# Altium PCB 显示与输入.PcbDoc (part 1 of 2)
Units mil, origin at the board's own origin, x right, y up, seen from the top; angles counter-clockwise.
Board outline 6446.74 x 5131.17 mil, 2 copper layers (Top Layer, Bottom Layer); 64 components, 63 nets, 238 pads, 176 vias.
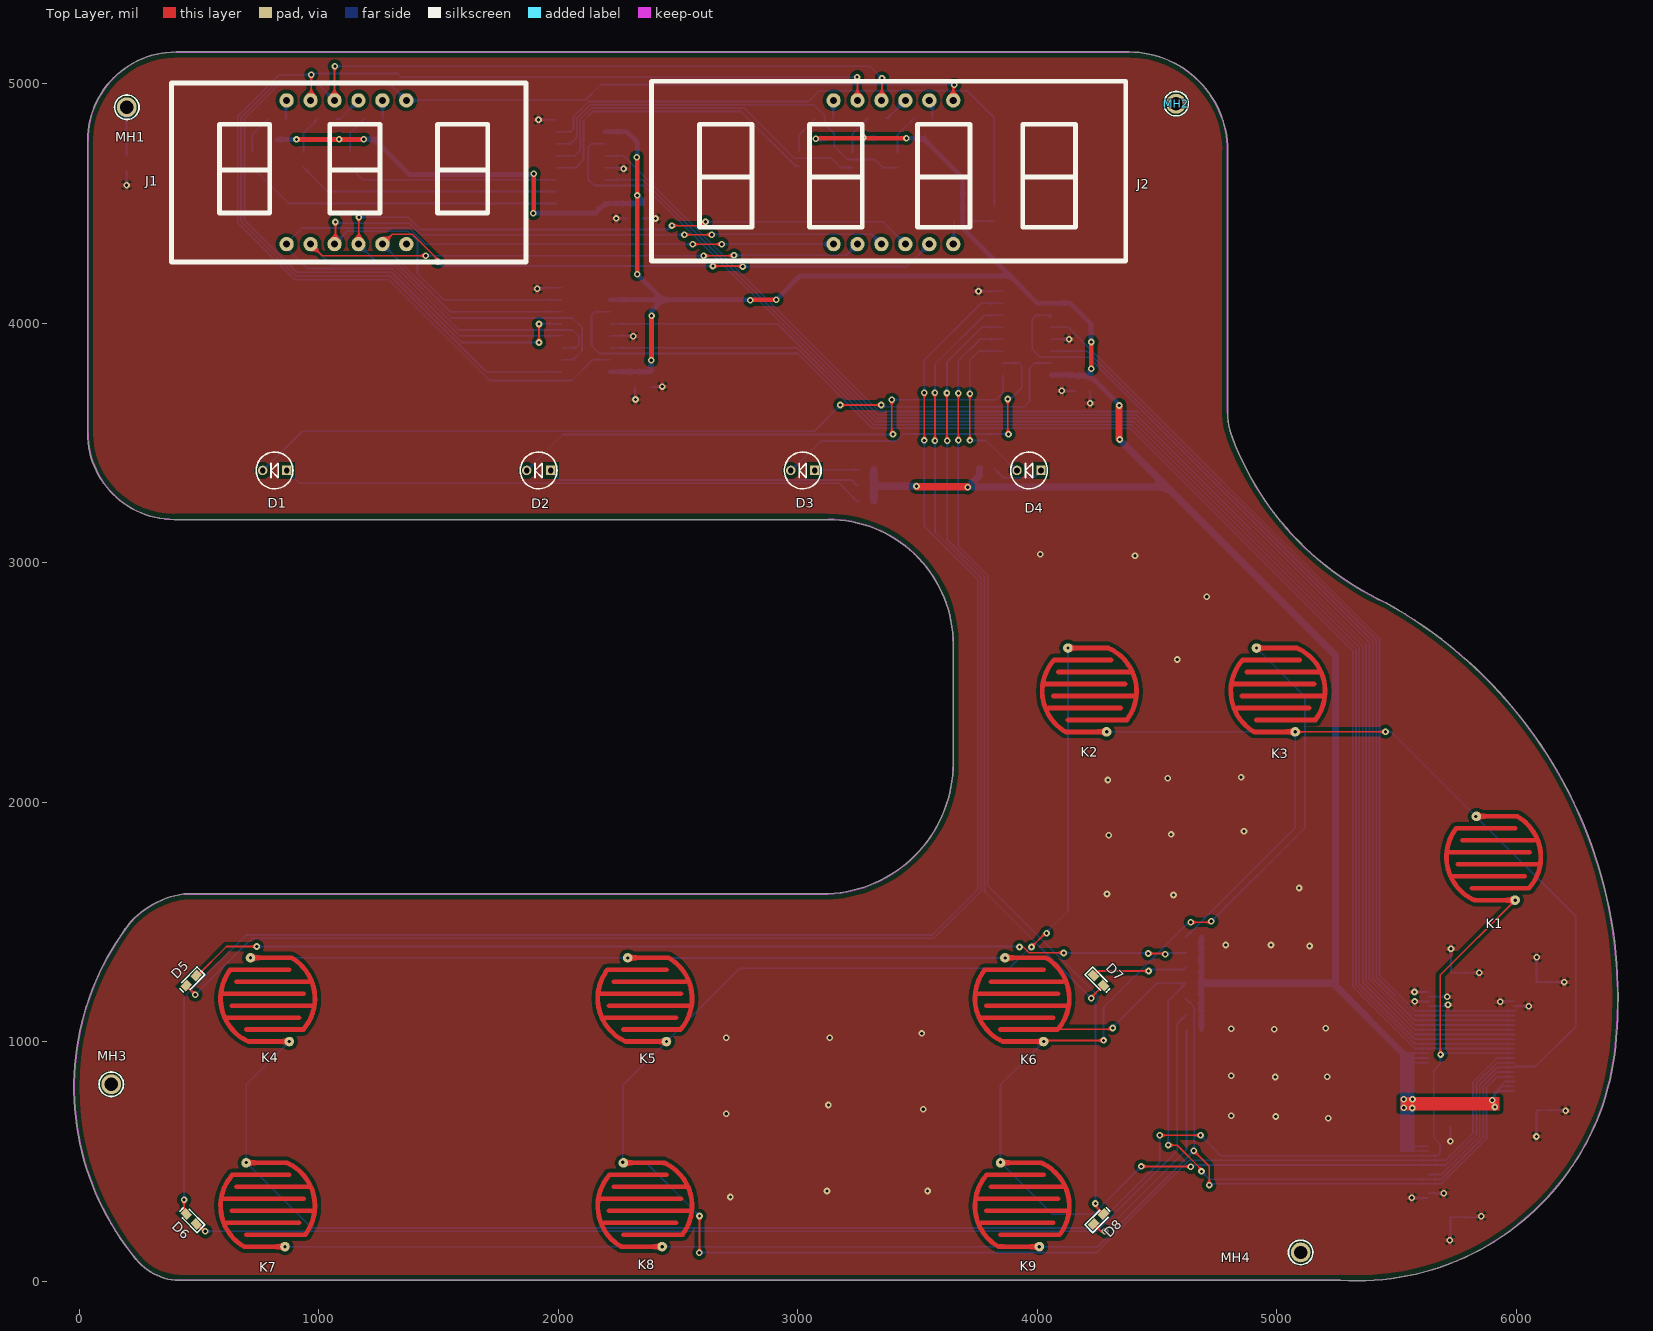
[diagram p0: Top Layer view]
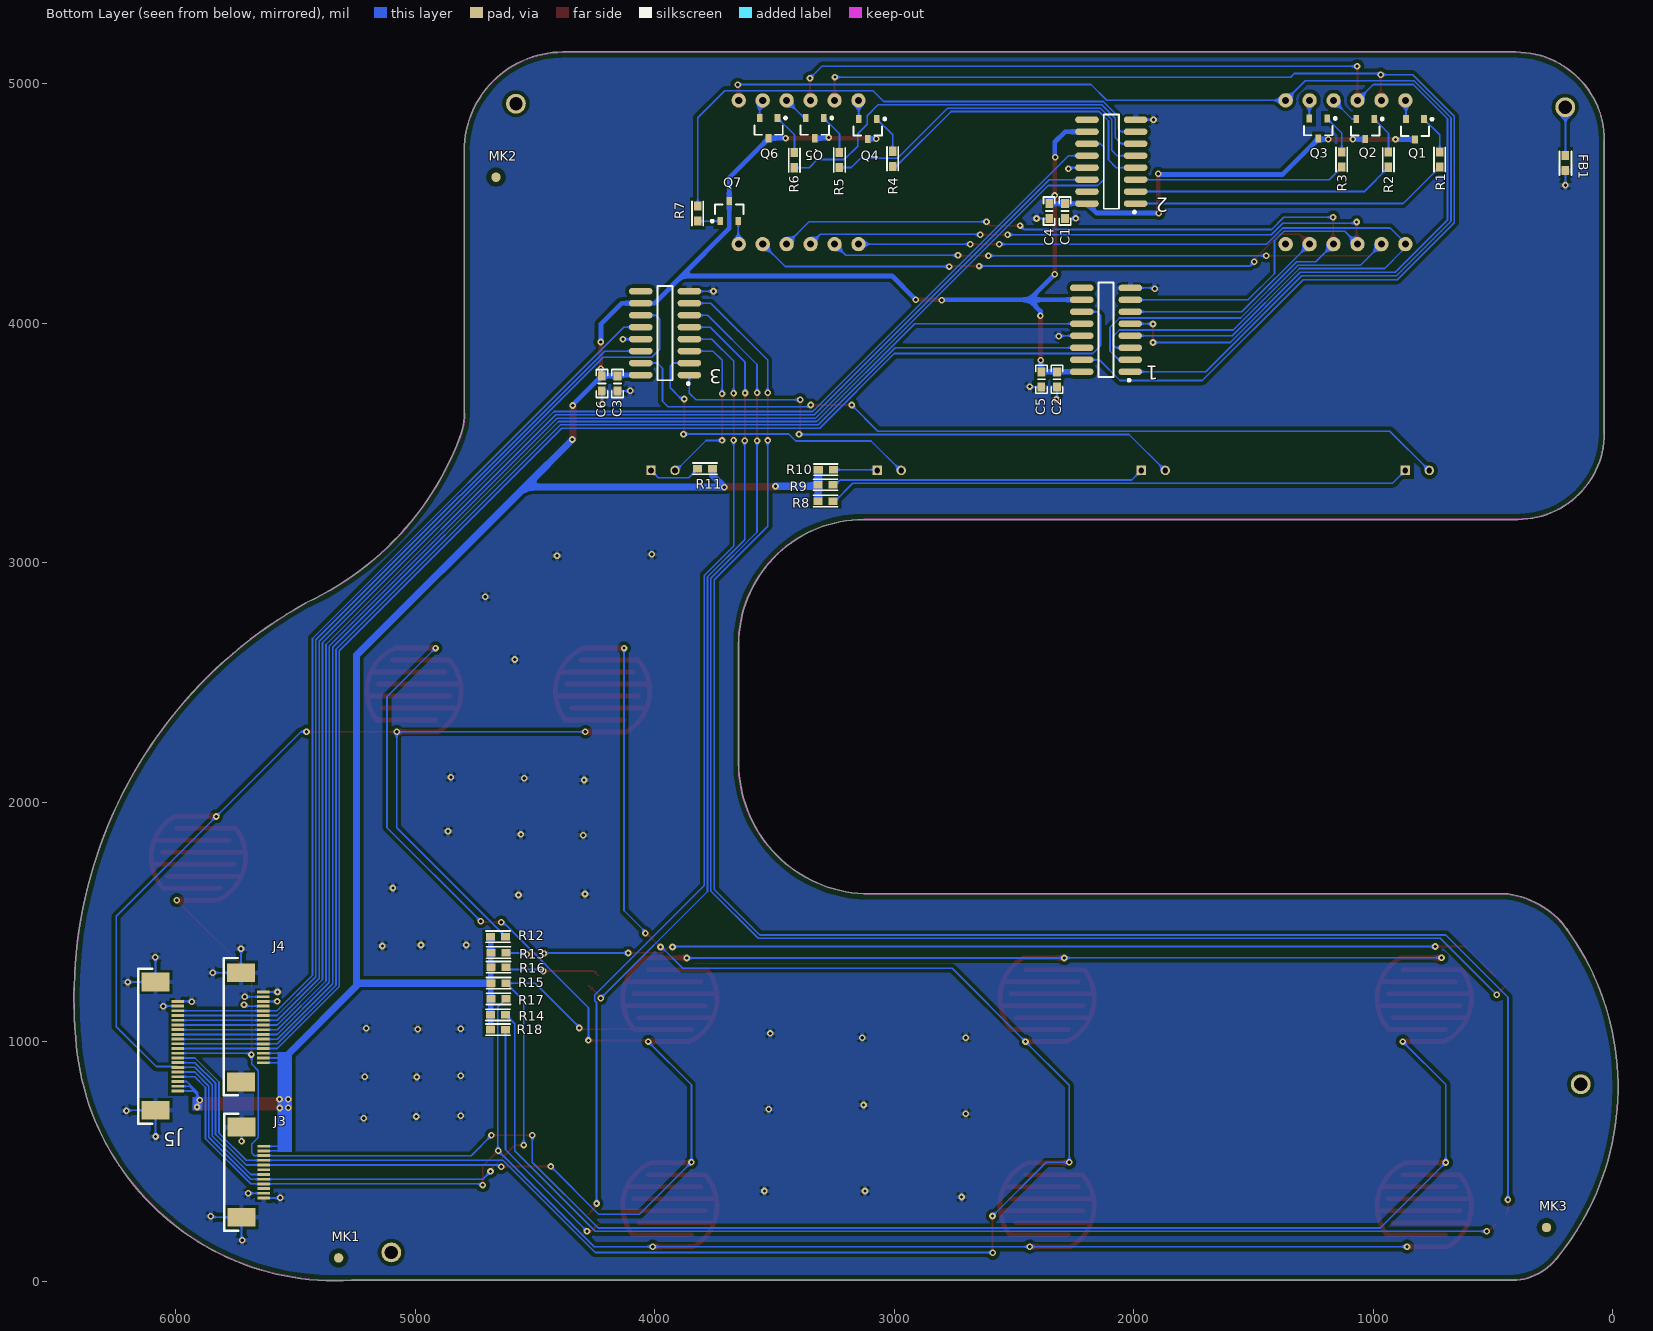
[diagram p1: Bottom Layer view, seen from below]

## Layer stack, top to bottom
Top Solder: solder mask 0.4, Solder Resist, Dk 3.5
Top Layer: signal copper 1.4
Dielectric 1: dielectric 12.6, FR-4, Dk 4.8
Bottom Layer: signal copper 1.4
Bottom Solder: solder mask 0.4, Solder Resist, Dk 3.5

## Board outline
236.76,92.43 ccw(c238.29,93.69) 237.54,91.86 ccw(c422.5,242.5) 416.95,4.02 ccw(c417,6) 417.02,4.02 5264.8,4.02 ccw(c5334,1087.59) 6417.47,1016.93 ccw(c5334,1087.59) 6417.48,1016.96 6417.47,1016.93 ccw(c4539.29,1185.8) 6425.05,1185.8 ccw(c4539.29,1185.8) 5455.66,2833.93 ccw(c5454.25,2832.54) 5455.08,2834.34 cw(c5976.33,3960.82) 4813.88,3525.63 ccw(c4811.9,3525.58) 4813.74,3526.33 cw(c5056.28,3624.72) 4794.54,3625 4795.9,4719.73 ccw(c4793.91,4719.73) 4795.9,4719.73 ccw(c4793.91,4719.73) 4795.88,4719.98 ccw(c4793.91,4720.24) 4795.9,4720.24 ccw(c4383.15,4720.24) 4383.18,5132.98 ccw(c4383.15,4720.24) 4383.15,5132.98 cw(c4383.15,5131) 4383.18,5132.98 4383.15,5132.98 404.74,5132.98 ccw(c404.74,4763.26) 35.02,4763.26 35.02,3542.05 ccw(c396.26,3542.05) 396.26,3180.81 3127.08,3180.81 cw(c3127.08,2658.87) 3649.02,2658.87 3649.02,2164.06 cw(c3102.94,2164.06) 3102.94,1617.98 438,1617.98 ccw(c438,1616) 437.72,1617.96 ccw(c490.5,1246.5) 215.65,1501.9 ccw(c216.47,1500.1) 214.91,1501.31 ccw(c1104.5,810.5)

## Design rules (kind name [scope] priority, off if disabled: settings)
AcuteAngle [All] p1: minimum=4.50000000000000E+0001 checktracksonly=TRUE // 默认角
Clearance Clearance_MK [(Component Like 'MK*')] p1: gap=20
Clearance Clearance_keep [InPolygon vs OnLayer('Keep-Out Layer')] p2: gap=20
Clearance Clearance_MH [InPolygon vs HasFootprint('AS_D3mm-6mm')] p3: gap=25
Clearance Clearance_poly [InPolygon] p4: gap=15 // 更改敷铜间距设置，默认20mil
Clearance Clearance_via_all [isvia] p5: gap=7 // 过孔安全间距设置，默认7mil
Clearance Clearance_pad_all [ispad] p6: gap=7 // 焊盘安全间距设置，默认7mil
Clearance Clearance_All [All] p7: gap=7 // 全局安全间距设置，默认7mil
ComponentClearance [All] p1: gap=4 collisioncheckmode=3 verticalgap=4 showdistances=FALSE
DiffPairsRouting DiffPairsRouting_all [(InDifferentialPairClass('All Differential Pairs'))] p1: maxlimit=7 minlimit=7 mostfreqgap=7 toplayer_minwidth=15 toplayer_maxwidth=15 toplayer_prefwidth=15 bottomlayer_minwidth=15 bottomlayer_maxwidth=15 bottomlayer_prefwidth=15 maxuncoupledlength=500 // 更改差分在每层
HoleSize [All] p1: absolutevalues=TRUE maxlimit=393.7 minlimit=1 maxpercent=80.000 minpercent=20.000
HoleToHoleClearance [All] p1: gap=4 allowstackedmicrovias=TRUE
Length [All] p1: maxlimit=99999 minlimit=0
MatchedLengths DiffPair_MatchedLengths [InDifferentialPair ('RXIN1') Or InDifferentialPair ('RXIN2') Or InDifferentialPair ('RXIN0') Or InDifferentialPair ('RXCLK')] p1: tolerance=100 checknetsindiffpair=TRUE checkdiffpairvsdiffpair=TRUE checkothers=TRUE
MinimumSolderMaskSliver [All] p1: minsoldermaskwidth=4
PlaneClearance PlaneClearance_via [isvia] p1: clearance=20 // 过孔在Plane层的隔离大小设置，在过孔密
PlaneClearance PlaneClearance_all [All] p2: clearance=20
PlaneConnect PlaneConnect_via [isvia] p1: planeconnectstyle=Direct reliefexpansion=20 reliefentries=4 reliefconductorwidth=10 reliefairgap=10 // 电源地在plane层过孔全连接
PlaneConnect PlaneConnect_all [All] p2: planeconnectstyle=Relief reliefexpansion=20 reliefentries=4 reliefconductorwidth=10 reliefairgap=10
PolygonConnect PolygonConnect_DGND [InNet('DGND')] p1: connectstyle=Relief reliefconductorwidth=20 reliefentries=4 polygonreliefangle="90 Angle" airgapwidth=10
PolygonConnect PolygonConnect_via [isvia] p2: connectstyle=Direct reliefconductorwidth=10 reliefentries=4 polygonreliefangle="90 Angle" airgapwidth=10 // 敷铜过孔全连接
PolygonConnect PolygonConnect_AGND [InNet('AGND')] p3: connectstyle=Relief reliefconductorwidth=20 reliefentries=4 polygonreliefangle="90 Angle" airgapwidth=10 // 敷铜过孔全连接
PolygonConnect PolygonConnect_all [All] p4: connectstyle=Direct reliefconductorwidth=10 reliefentries=4 polygonreliefangle="90 Angle" airgapwidth=10
RoutingCorners [All] p1: cornerstyle=45-Degree minsetback=50 maxsetback=50
RoutingVias RoutingVias_all [All] p1: holewidth=13.78 width=27.56 viastyle="Through Hole" minholewidth=13.78 minwidth=27.56 maxholewidth=35.43 maxwidth=50 // 更改过孔设置，默认最小12/24mil 最大20/40mil
SMDNeckDown [All] p1: percent=200.000
ShortCircuit [(Component Like 'MH*') vs InNet('No Net') and isvia] p1: allowed=TRUE
SilkToSilkClearance [All] p1: silktosilkclearance=4
SilkToSolderMaskClearance SilkscreenOverComponentPads [IsPad] p1: minsilkscreentomaskgap=4 clearancetoexposedcopper=TRUE
SolderMaskExpansion [All] p1: expansion=4
Width Width_all [All] p1: maxlimit=100 minlimit=7 preferedwidth=7
19 further rules are at their usual default settings.

## Components (designator, comment, footprint, x,y, rotation, side; value= is the part's Value field where it differs from the comment)
1 "74HC595" SOIC-16 2116,3973 r0 bottom
2 "74HC595" SOIC-16 2094,4675 r0 bottom
3 "74HC595" SOIC-16 3957,3959 r0 bottom
C1 "100nf" Cap0603 2287.32,4469 r90 bottom
C2 "100nf" Cap0603 2320.68,3766 r90 bottom
C3 "100nf" Cap0603 4155.69,3749 r90 bottom
C4 "10uf/16V" Cap0603 2353.32,4469 r90 bottom
C5 "10uf/16V" Cap0603 2385.68,3766 r90 bottom
C6 "10uf/16V" Cap0603 4220.69,3749 r90 bottom
D1 "LED" LED_DIP_3mm 866.14,3385.83 r180 top
D2 "LED" LED_DIP_3mm 1968.5,3385.83 r180 top
D3 "LED" LED_DIP_3mm 3070.87,3385.83 r180 top
D4 "LED" LED_DIP_3mm 4015.75,3385.83 r180 top
D5 "LED" LED0603 472.44,1259.84 r225 top
D6 "LED" LED0603 472.44,255.91 r135 top
D7 "LED" LED0603 4251.97,1259.84 r315 top
D8 "LED" LED0603 4251.97,255.91 r45 top
FB1 "0R" FB0603 198,4669 r90 bottom
J1 "DPY-3CA" 3位数码管0.56寸 866.14,4330.71 r0 top locked
J2 "DPY-4CA" 4位数码管0.56寸 3149.61,4330.71 r0 top locked
J3 "FPC12-0.5" FPC0.5-12P 5679,456 r90 bottom
J4 "FPC16_0.5" FPC0.5-16P 5717,1056 r90 bottom
J5 "FPC20-0.5" FPC0.5-20P 6073,980 r270 bottom
K1 "SW-PB" PCB-KEY#1 5905.51,1771.65 r270 top
K2 "SW-PB" PCB-KEY#2 4217.86,2464.2 r90 top
K3 "SW-PB" PCB-KEY#3 5005.26,2464.2 r90 top
K4 "SW-PB" PCB-KEY#4 787.4,1181.1 r270 top
K5 "SW-PB" PCB-KEY#5 2362.2,1181.1 r270 top
K6 "SW-PB" PCB-KEY#6 3937.01,1181.1 r270 top
K7 "SW-PB" PCB-KEY#7 787.4,314.96 r90 top
K8 "SW-PB" PCB-KEY#8 2362.2,314.96 r90 top
K9 "SW-PB" PCB-KEY#9 3937.01,314.96 r90 top
MH1 "MH" AS_D1mm_2mm#1 199,4902 r0 top
MH2 "MH" AS_D1mm_2mm#2 4580,4917 r0 top
MH3 "MH" AS_D1mm_2mm#2 134,823 r0 top
MH4 "MH" AS_D1mm_2mm#2 5100,121 r0 top
MK1 "Mark" MK 5320,98 r180 bottom
MK2 "Mark" MK 4663,4610 r90 bottom
MK3 "Mark" MK 277,225 r90 bottom
Q1 "S8550" SOT-23B 826,4810 r270 bottom
Q2 "S8550" SOT-23B 1034,4811 r270 bottom
Q3 "S8550" SOT-23B 1230,4813 r270 bottom
Q4 "S8550" SOT-23B 3111,4811 r270 bottom
Q5 "S8550" SOT-23B 3332,4815 r270 bottom
Q6 "S8550" SOT-23B 3525,4815 r270 bottom
Q7 "S8550" SOT-23B 3689,4469 r90 bottom
R1 "1K,5%" Res0603 723,4684 r90 bottom
R2 "1K,5%" Res0603 937,4683 r90 bottom
R3 "1K,5%" Res0603 1132,4684 r90 bottom
R4 "1K,5%" Res0603 3007,4687 r90 bottom
R5 "1K,5%" Res0603 3229,4682 r90 bottom
R6 "1K,5%" Res0603 3417,4681 r90 bottom
R7 "1K,5%" Res0603 3821,4458 r270 bottom
R8 "1K,5%" Res0603 3287,3258 r180 bottom
R9 "1K,5%" Res0603 3287,3326 r180 bottom
R10 "1K,5%" Res0603 3286,3389 r180 bottom
R11 "1K,5%" Res0603 3790,3393 r0 bottom
R12 "10K,5%" Res0603 4654,1439 r180 bottom
R13 "1K,5%" Res0603 4653,1373 r180 bottom
R14 "1K,5%" Res0603 4654,1113 r180 bottom
R15 "10K,5%" Res0603 4652,1245 r180 bottom
R16 "1K,5%" Res0603 4652,1312 r180 bottom
R17 "10K,5%" Res0603 4652,1180 r180 bottom
R18 "1K,5%" Res0603 4655,1051 r180 bottom

## Footprints (in the part's own frame and the unit in brackets; to place one, negate y for a bottom-side part, rotate by r counter-clockwise, add the part's x,y. Pads: shape width x height; smd on the part's side, far side on the other; paste and mask are expansions set on the pad)
3位数码管0.56寸 [mil]
  round 60 hole 30: 1(0,0) 2(100,0) 3(200,0) 4(300,0) 5(400,0) 6(500,0) 7(500,600) 8(400,600) 9(300,600) 10(200,600) 11(100,600) 12(0,600)
  silkscreen extent -480,-75 1000,673
4位数码管0.56寸 [mil]
  round 60 hole 30: 1(0,0) 2(100,0) 3(200,0) 4(300,0) 5(400,0) 6(500,0) 7(500,600) 8(400,600) 9(300,600) 10(200,600) 11(100,600) 12(0,600)
  silkscreen extent -760,-70 1220,680
AS_D1mm_2mm#1 [mm] "内径1mm，外径2"
  round 2.1 hole 1.4: MH1(0,0)
  silkscreen extent -1.3,-1.3 1.3,1.3
AS_D1mm_2mm#2 [mm] "内径1mm，外径2"
  round 2.1 hole 1.4 unplated: MH1(0,0)
  silkscreen extent -1.3,-1.3 1.3,1.3
Cap0603 [mm] "0603电容"
  rect 0.965x0.8 smd: 1(-0.8,0) 2(0.8,0)
  silkscreen extent -1.48,-0.6 1.48,0.6
FB0603 [mm] "0603磁珠"
  rect 0.965x0.8 smd: 1(-0.8,0) 2(0.8,0)
  silkscreen extent -1.27,-0.64 1.27,0.64
FPC0.5-12P [mm] "FPC0.5-12P;0.5mm;"
  rect 0.3x1.3 smd mask+0.051: 1(-2.744,-1.175) 2(-2.244,-1.175) 3(-1.744,-1.175) 4(-1.244,-1.175) 5(-0.744,-1.175) 6(-0.244,-1.175) 7(0.256,-1.175) 8(0.756,-1.175) 9(1.256,-1.175) 10(1.756,-1.175) 11(2.256,-1.175) 12(2.756,-1.175)
  rect 2x3 smd mask+0.051: 13(-4.787,1.175) 14(4.787,1.175)
  silkscreen extent -6.2,1.5 6.2,3
FPC0.5-16P [mm] "FPC0.5-16P;0.5mm"
  rect 0.3x1.3 smd mask+0.051: 1(-3.633,-2.081) 2(-3.133,-2.081) 3(-2.633,-2.081) 4(-2.133,-2.081) 5(-1.633,-2.081) 6(-1.133,-2.081) 7(-0.633,-2.081) 8(-0.133,-2.081) 9(0.367,-2.081) 10(0.867,-2.081) 11(1.367,-2.081) 12(1.867,-2.081) 13(2.367,-2.081) 14(2.867,-2.081) 15(3.367,-2.081) 16(3.867,-2.081)
  rect 2x3 smd mask+0.051: 17(-5.676,0.268) 18(5.91,0.269)
  silkscreen extent -7.09,0.59 7.47,2.09
FPC0.5-20P [mm] "FPC0.5-20P;0.5mm;"
  rect 0.3x1.3 smd mask+0.051: 1(-4.806,2.064) 2(-4.306,2.064) 3(-3.806,2.064) 4(-3.306,2.064) 5(-2.806,2.064) 6(-2.306,2.064) 7(-1.806,2.064) 8(-1.306,2.064) 9(-0.806,2.064) 10(-0.306,2.064) 11(0.194,2.064) 12(0.694,2.064) 13(1.194,2.064) 14(1.694,2.064) 15(2.194,2.064) 16(2.694,2.064) 17(3.194,2.064) 18(3.694,2.064) 19(4.194,2.064) 20(4.694,2.064)
  rect 2x3 smd mask+0.051: 21(-6.849,-0.286) 22(6.737,-0.286)
  silkscreen extent -8.26,-2.11 8.18,-0.61
LED0603 [mm]
  rect 1x0.8 smd: A(-0.6,0) K(0.9,0)
  silkscreen extent -1.3,-0.58 1.6,0.58
LED_DIP_3mm [mm] "3mm 直插LED"
  rect 1x1 hole 0.6: A(0,0)
  round 1 hole 0.6: K(2.54,0)
  silkscreen extent -0.68,-1.95 3.22,1.95
MK [mm] "贴片Mark点"
  round 1 smd mask+0.5: MK(0,0)
PCB-KEY#1 [mil]
  round 40 smd: 1(-169.96,-72) 2(179.96,90)
  Top Layer lines w20: -20,-190 -20,150 ; -120,-157.48 -120,90 ; 30,-150 30,136.14 30,190 ; -70,-130 -70,134.83 -70,170 ; 130,-90 130,148.76 ; -169.96,-72 -169.96,-70.77 -169.9,70.1 -169.88,97.95 ; -169.67,99.81 cw(c0,0) -51.48,190 cw(c0,0) 128.92,148.76 ; 80,-179.86 cw(c0,0) -118.11,-157.48 ccw(c0,0) -108.1,-164.51 ccw(c0,0) 51.48,-190 ccw(c0,0) 80,-179.86 ; 80,-179.86 ccw(c0,0) 179.88,-79.95 ; 80,-179.86 ccw(c0,0) 179.88,-79.95 ; 80,-179.86 80,130 80,-179.86 ; 80,-179.86 80,-179.86 ; 80,-179.86 80,-179.86 ; 80,-179.86 80,-179.86 ; 80,-179.86 80,-179.86 ; 80,-179.86 80,-179.86 ; 80,-179.86 80,-179.86 ; 80,-179.86 80,-179.86 ; 80,-179.86 80,-179.86 ; 80,-179.86 80,-179.86 ; 80,-179.86 80,-179.86 ; 80,-179.86 80,-179.86 ; 80,-179.86 80,-179.86 ; 80,-179.86 80,-179.86 ; 80,-179.86 80,-179.86 ; 80,-179.86 80,-179.86 ; 80,-179.86 80,-179.86 ; 80,-179.86 80,-179.86 ; 80,-179.86 80,-179.86 ; 80,-179.86 80,-179.86 ; 80,-179.86 80,-179.86 ; 80,-179.86 80,-179.86 ; 80,-179.86 80,-179.86 ; 80,-179.86 80,-179.86 ; 80,-179.86 80,-179.86 ; 80,-179.86 80,-179.86 ; 80,-179.86 80,-179.86 ; 80,-179.86 80,-179.86 ; 80,-179.86 80,-179.86 ; 80,-179.86 80,-179.86 ; 80,-179.86 80,-179.86 ; 80,-179.86 80,-179.86 ; 80,-179.86 80,-179.86 ; 80,-179.86 80,-179.86 ; 80,-179.86 80,-179.86 ; 80,-179.86 80,-179.86 ; 80,-179.86 80,-179.86 ; 80,-179.86 80,-179.86 ; 80,-179.86 80,-179.86 ; 80,-179.86 80,-179.86 ; 80,-179.86 80,-179.86 ; 80,-179.86 80,-179.86 ; 80,-179.86 80,-179.86 ; 80,-179.86 80,-179.86 ; 80,-179.86 80,-179.86 ; 80,-179.86 80,-179.86 ; 80,-179.86 80,-179.86 ; 80,-179.86 80,-179.86 ; 80,-179.86 80,-179.86 ; 80,-179.86 80,-179.86 ; 80,-179.86 80,-179.86 ; 80,-179.86 80,-179.86 ; 80,-179.86 80,-179.86 ; 80,-179.86 80,-179.86 ; 80,-179.86 80,-179.86 ; 80,-179.86 80,-179.86 ; 80,-179.86 80,-179.86 ; 80,-179.86 80,-179.86 ; 80,-179.86 80,-179.86 ; 80,-179.86 80,-179.86 ; 80,-179.86 80,-179.86 ; 80,-179.86 80,-179.86 ; 80,-179.86 80,-179.86 ; 80,-179.86 80,-179.86 ; 80,-179.86 80,-179.86 ; 80,-179.86 80,-179.86 ; 80,-179.86 80,-179.86 ; 80,-179.86 80,-179.86 ; 80,-179.86 80,-179.86 ; 80,-179.86 80,-179.86 ; 80,-179.86 80,-179.86 ; 80,-179.86 80,-179.86 ; 80,-179.86 80,-179.86 ; 80,-179.86 80,-179.86 ; 80,-179.86 80,-179.86 ; 80,-179.86 80,-179.86 ; 80,-179.86 80,-179.86 ; 80,-179.86 80,-179.86 ; 80,-179.86 80,-179.86 ; 80,-179.86 80,-179.86 ; 80,-179.86 80,-179.86 ; 80,-179.86 80,-179.86 ; 80,-179.86 80,-179.86 ; 80,-179.86 80,-179.86 ; 80,-179.86 80,-179.86 ; 80,-179.86 80,-179.86 ; 80,-179.86 80,-179.86 ; 80,-179.86 80,-179.86 ; 80,-179.86 80,-180 80,-179.86 ; 80,-179.86 80,-179.86 ; 80,-179.86 80,-179.86 ; 80,-179.86 80,-179.86 ; 80,-179.86 80,-179.86 ; 80,-179.86 80,-179.86 ; 80,-179.86 80,-179.86 ; 80,-179.86 80,-179.86 ; 80,-179.86 80,-179.86 ; 80,-179.86 80,-179.86 ; 80,-179.86 80,-179.86 ; 80,-179.86 80,-179.86 ; 80,-179.86 80,-179.86 ; 80,-179.86 80,-179.86 ; 80,-179.86 80,-179.86 ; 80,-179.86 80,-179.86 ; 179.88,-79.95 179.88,-79.95 ; 179.88,-79.95 179.88,-79.95 ; 179.88,-79.95 179.88,-79.95 ; 179.88,-79.95 179.88,-79.95 ; 179.88,-79.95 179.88,-79.95 ; 179.88,-79.95 179.88,-79.95 ; 179.88,-79.95 179.88,-79.95 ; 179.88,-79.95 179.88,-79.95 ; 179.88,-79.95 179.88,-79.95 ; 179.88,-79.95 179.88,-79.95 ; 179.88,-79.95 179.88,-79.95 ; 179.88,-79.95 179.88,-79.95 ; 179.88,-79.95 179.88,-79.95 ; 179.88,-79.95 179.88,-79.95 ; 179.88,-79.95 179.88,-79.95 ; 179.88,-79.95 179.88,-79.95 ; 179.88,-79.95 179.88,-79.95 ; 179.88,-79.95 179.88,-79.95 ; 179.88,-79.95 179.88,-79.95 ; 179.88,-79.95 179.88,-79.95 ; 179.88,-79.95 179.88,-79.95 ; 179.88,-79.95 179.88,-79.95 ; 179.88,-79.95 179.88,-79.95 ; 179.88,-79.95 179.88,-79.95 ; 179.88,-79.95 179.88,-79.95 ; 179.88,-79.95 179.88,-79.95 ; 179.88,-79.95 179.88,-79.95 ; 179.88,-79.95 179.88,-79.95 ; 179.88,-79.95 179.88,-79.95 ; 179.88,-79.95 179.88,-79.95 ; 179.88,-79.95 179.88,-79.95 ; 179.88,-79.95 179.88,-79.95 ; 179.88,-79.95 179.88,-79.95 ; 179.88,-79.95 179.88,-79.95 ; 179.88,-79.95 179.88,-79.95 ; 179.88,-79.95 179.88,-79.95 ; 179.88,-79.95 179.88,-79.95 ; 179.88,-79.95 179.88,-79.95 ; 179.88,-79.95 179.88,-79.95 ; 179.88,-79.95 179.88,-79.95 ; 179.88,-79.95 179.88,-79.95 ; 179.88,-79.95 179.88,-79.95 ; 179.88,-79.95 179.88,-79.95 ; 179.88,-79.95 179.88,-79.95 ; 179.88,-79.95 179.88,-79.95 ; 179.88,-79.95 179.88,-79.95 ; 179.88,-79.95 179.88,-79.95 ; 179.88,-79.95 179.88,-79.95 ; 179.88,-79.95 179.88,-79.95 ; 179.88,-79.95 179.88,-79.95 ; 179.88,-79.95 179.88,-79.95 ; 179.88,-79.95 179.88,-79.95 ; 179.88,-79.95 179.88,-79.95 ; 179.88,-79.95 179.88,-79.95 ; 179.88,-79.95 179.88,-79.95 ; 179.88,-79.95 179.88,-79.95 ; 179.88,-79.95 179.88,-79.95 ; 179.88,-79.95 179.88,-79.95 ; 179.88,-79.95 179.88,-79.95 ; 179.88,-79.95 179.88,-79.95 ; 179.88,-79.95 179.88,-79.95 ; 179.88,-79.95 179.88,-79.95 ; 179.88,-79.95 179.88,-79.95 ; 179.88,-79.95 179.88,-79.95 ; 179.88,-79.95 179.88,-79.95 ; 179.88,-79.95 179.88,-79.95 ; 179.88,-79.95 179.88,-79.95 ; 179.88,-79.95 179.88,-79.95 ; 179.88,-79.95 179.88,-79.95 ; 179.88,-79.95 179.88,-79.95 ; 179.88,-79.95 179.88,-79.95 ; 179.88,-79.95 179.88,-79.95 ; 179.88,-79.95 179.88,-79.95 ; 179.88,-79.95 179.88,-79.95 ; 179.88,-79.95 179.88,-79.95 ; 179.88,-79.95 179.88,-79.95 ; 179.88,-79.95 179.96,90 179.88,-79.95 ; 179.88,-79.95 179.88,-79.95 ; 179.88,-79.95 179.88,-79.95 ; 179.88,-79.95 179.88,-79.95 ; 179.88,-79.95 179.88,-79.95 ; 179.88,-79.95 179.88,-79.95 ; 179.88,-79.95 179.88,-79.95 ; 179.88,-79.95 179.88,-79.95 ; 179.88,-79.95 179.88,-79.95 ; 179.88,-79.95 179.88,-79.95 ; 179.88,-79.95 179.88,-79.95 ; 179.88,-79.95 179.88,-79.95 ; 179.88,-79.95 179.88,-79.95 ; 179.88,-79.95 179.88,-79.95 ; 179.88,-79.95 179.88,-79.95 ; 179.88,-79.95 179.88,-79.95 ; 179.88,-79.95 179.88,-79.95 ; 179.88,-79.95 179.88,-79.95 ; 179.88,-79.95 179.88,-79.95 ; 179.88,-79.95 179.88,-79.95 ; 179.88,-79.95 179.88,-79.95 ; 179.88,-79.95 179.88,-79.95 ; 179.88,-79.95 179.88,-79.95 ; 179.88,-79.95 179.88,-79.95 ; 179.88,-79.95 179.88,-79.95 ; 179.88,-79.95 179.88,-79.95 ; 179.88,-79.95 179.88,-79.95 ; 179.88,-79.95 179.88,-79.95 ; 179.88,-79.95 179.88,-79.95
PCB-KEY#2 [mil]
  round 40 smd: 1(-169.96,-72) 2(179.96,90)
  Top Layer lines w20: 30,190 30,-150 ; -70,170 -70,-110.8 -70,-130 ; -20,150 -20,-136.94 -20,-190 ; 128.92,148.76 ccw(c0,0) -169.67,99.81 ; 130,148.76 130,-90 ; -169.88,97.95 -169.96,-72 ; -120,90 -120,-80.94 -120,-157.48 ; 179.96,90 179.96,89.56 ; 179.96,89.56 179.88,-79.95 ; 179.96,89.56 179.88,-79.95 ; 179.88,-79.95 cw(c0,0) 80,-179.86 ; 179.88,-79.95 cw(c0,0) 80,-179.86 ; 179.88,-79.95 179.88,-79.95 ; 179.88,-79.95 179.88,-79.95 ; 179.88,-79.95 179.88,-79.95 ; 179.88,-79.95 179.88,-79.95 ; 179.88,-79.95 179.88,-79.95 ; 179.88,-79.95 179.88,-79.95 ; 179.88,-79.95 179.88,-79.95 ; 179.88,-79.95 179.88,-79.95 ; 179.88,-79.95 179.88,-79.95 ; 179.88,-79.95 179.88,-79.95 ; 179.88,-79.95 179.88,-79.95 ; 179.88,-79.95 179.88,-79.95 ; 179.88,-79.95 179.88,-79.95 ; 179.88,-79.95 179.88,-79.95 ; 179.88,-79.95 179.88,-79.95 ; 179.88,-79.95 179.88,-79.95 ; 179.88,-79.95 179.88,-79.95 ; 179.88,-79.95 179.88,-79.95 ; 179.88,-79.95 179.88,-79.95 ; 179.88,-79.95 179.88,-79.95 ; 179.88,-79.95 179.88,-79.95 ; 179.88,-79.95 179.88,-79.95 ; 179.88,-79.95 179.88,-79.95 ; 179.88,-79.95 179.88,-79.95 ; 179.88,-79.95 179.88,-79.95 ; 179.88,-79.95 179.88,-79.95 ; 179.88,-79.95 179.88,-79.95 ; 179.88,-79.95 179.88,-79.95 ; 179.88,-79.95 179.88,-79.95 ; 179.88,-79.95 179.88,-79.95 ; 179.88,-79.95 179.88,-79.95 ; 179.88,-79.95 179.88,-79.95 ; 179.88,-79.95 179.88,-79.95 ; 179.88,-79.95 179.88,-79.95 ; 179.88,-79.95 179.88,-79.95 ; 179.88,-79.95 179.88,-79.95 ; 179.88,-79.95 179.88,-79.95 ; 179.88,-79.95 179.88,-79.95 ; 179.88,-79.95 179.88,-79.95 ; 179.88,-79.95 179.88,-79.95 ; 179.88,-79.95 179.88,-79.95 ; 179.88,-79.95 179.88,-79.95 ; 179.88,-79.95 179.88,-79.95 ; 179.88,-79.95 179.88,-79.95 ; 179.88,-79.95 179.88,-79.95 ; 179.88,-79.95 179.88,-79.95 ; 179.88,-79.95 179.88,-79.95 ; 179.88,-79.95 179.88,-79.95 ; 179.88,-79.95 179.88,-79.95 ; 179.88,-79.95 179.88,-79.95 ; 179.88,-79.95 179.88,-79.95 ; 179.88,-79.95 179.88,-79.95 ; 179.88,-79.95 179.88,-79.95 ; 179.88,-79.95 179.88,-79.95 ; 179.88,-79.95 179.88,-79.95 ; 179.88,-79.95 179.88,-79.95 ; 179.88,-79.95 179.88,-79.95 ; 179.88,-79.95 179.88,-79.95 ; 179.88,-79.95 179.88,-79.95 ; 179.88,-79.95 179.88,-79.95 ; 179.88,-79.95 179.88,-79.95 ; 179.88,-79.95 179.88,-79.95 ; 179.88,-79.95 179.88,-79.95 ; 179.88,-79.95 179.88,-79.95 ; 179.88,-79.95 179.88,-79.95 ; 179.88,-79.95 179.88,-79.95 ; 179.88,-79.95 179.88,-79.95 ; 179.88,-79.95 179.88,-79.95 ; 179.88,-79.95 179.88,-79.95 ; 179.88,-79.95 179.88,-79.95 ; 179.88,-79.95 179.88,-79.95 ; 179.88,-79.95 179.88,-79.95 ; 179.88,-79.95 179.88,-79.95 ; 179.88,-79.95 179.88,-79.95 ; 179.88,-79.95 179.88,-79.95 ; 179.88,-79.95 179.88,-79.95 ; 179.88,-79.95 179.88,-79.95 ; 179.88,-79.95 179.88,-79.95 ; 179.88,-79.95 179.88,-79.95 ; 179.88,-79.95 179.88,-79.95 ; 179.88,-79.95 179.88,-79.95 ; 179.88,-79.95 179.88,-79.95 ; 179.88,-79.95 179.88,-79.95 ; 179.88,-79.95 179.88,-79.95 ; 179.88,-79.95 179.88,-79.95 ; 179.88,-79.95 179.88,-79.95 ; 179.88,-79.95 179.88,-79.95 ; 179.88,-79.95 179.88,-79.95 ; 179.88,-79.95 179.88,-79.95 ; 179.88,-79.95 179.88,-79.95 ; 80,-179.86 cw(c0,0) 51.48,-190 cw(c0,0) -67.85,-184.79 cw(c0,0) -118.11,-157.48 ccw(c0,0) 80,-179.86 ; 80,-179.86 80,-179.86 ; 80,-179.86 80,-179.86 ; 80,-179.86 80,-179.86 ; 80,-179.86 80,-179.86 ; 80,-179.86 80,-179.86 ; 80,-179.86 80,-179.86 ; 80,-179.86 80,-179.86 ; 80,-179.86 80,-179.86 ; 80,-179.86 80,-179.86 ; 80,-179.86 80,-179.86 ; 80,-179.86 80,-179.86 ; 80,-179.86 80,-179.86 ; 80,-179.86 80,-179.86 ; 80,-179.86 80,-179.86 ; 80,-179.86 80,-179.86 ; 80,-179.86 80,-179.86 ; 80,-179.86 80,-179.86 ; 80,-179.86 80,-179.86 ; 80,-179.86 80,-179.86 ; 80,-179.86 80,-179.86 ; 80,-179.86 80,-179.86 ; 80,-179.86 80,-179.86 ; 80,-179.86 80,-179.86 ; 80,-179.86 80,-179.86 ; 80,-179.86 80,-179.86 ; 80,-179.86 80,-179.86 ; 80,-179.86 80,-179.86 ; 80,-179.86 80,-179.86 ; 80,-179.86 80,-179.86 ; 80,-179.86 80,-179.86 ; 80,-179.86 80,-179.86 ; 80,-179.86 80,-179.86 ; 80,-179.86 80,-179.86 ; 80,-179.86 80,-179.86 ; 80,-179.86 80,-179.86 ; 80,-179.86 80,-179.86 ; 80,-179.86 80,-179.86 ; 80,-179.86 80,-179.86 ; 80,-179.86 80,-179.86 ; 80,-179.86 80,-179.86 ; 80,-179.86 80,-179.86 ; 80,-179.86 80,-179.86 ; 80,-179.86 80,-179.86 ; 80,-179.86 80,-179.86 ; 80,-179.86 80,-179.86 ; 80,-179.86 80,-179.86 ; 80,-179.86 80,-179.86 ; 80,-179.86 80,-179.86 ; 80,-179.86 80,-179.86 ; 80,-179.86 80,-179.86 ; 80,-179.86 80,-179.86 ; 80,-179.86 80,-180 80,-179.86 ; 80,-179.86 80,-179.86 ; 80,-179.86 80,-179.86 ; 80,-179.86 80,-179.86 ; 80,-179.86 80,-179.86 ; 80,-179.86 80,-179.86 ; 80,-179.86 80,-179.86 ; 80,-179.86 80,-179.86 ; 80,-179.86 80,-179.86 ; 80,-179.86 80,-179.86 ; 80,-179.86 80,-179.86 ; 80,-179.86 80,-179.86 ; 80,-179.86 80,-179.86 ; 80,-179.86 80,-179.86 ; 80,-179.86 80,-179.86 ; 80,-179.86 80,-179.86 ; 80,-179.86 80,-179.86 ; 80,-179.86 80,-179.86 ; 80,-179.86 80,-179.86 ; 80,-179.86 80,-179.86 ; 80,-179.86 80,-179.86 ; 80,-179.86 80,-179.86 ; 80,-179.86 80,-179.86 ; 80,-179.86 80,-179.86 ; 80,-179.86 80,-179.86 ; 80,-179.86 80,-179.86 ; 80,-179.86 80,-179.86 ; 80,-179.86 80,-179.86 ; 80,-179.86 80,-179.86 ; 80,-179.86 80,-179.86 ; 80,-179.86 80,-179.86 ; 80,-179.86 80,-179.86 ; 80,-179.86 80,-179.86 ; 80,-179.86 80,-179.86 ; 80,-179.86 80,-179.86 ; 80,-179.86 80,-179.86 ; 80,-179.86 80,-179.86 ; 80,-179.86 80,-179.86 ; 80,-179.86 80,130 80,-179.86 ; 80,-179.86 80,-179.86 ; 80,-179.86 80,-179.86
PCB-KEY#3 [mil]
  round 40 smd: 1(-169.96,-72) 2(179.96,90)
  Top Layer lines w20: 30,190 30,156.06 30,-150 ; -70,170 -70,78.06 -70,-130 ; -20,150 -20,-190 ; 128.92,148.76 ccw(c0,0) -10.51,196.57 ccw(c0,0) -169.67,99.81 ; 130,148.76 130,-90 ; -169.88,97.95 -169.89,76.57 -169.96,-72 ; -120,90 -120,-14.74 -120,-157.48 ; 179.88,-79.95 cw(c0,0) 80,-179.86 ; 179.88,-79.95 cw(c0,0) 80,-179.86 ; 179.88,-79.95 179.88,-79.95 ; 179.88,-79.95 179.88,-79.95 ; 179.88,-79.95 179.88,-79.95 ; 179.88,-79.95 179.88,-79.95 ; 179.88,-79.95 179.88,-79.95 ; 179.88,-79.95 179.88,-79.95 ; 179.88,-79.95 179.88,-79.95 ; 179.88,-79.95 179.88,-79.95 ; 179.88,-79.95 179.88,-79.95 ; 179.88,-79.95 179.88,-79.95 ; 179.88,-79.95 179.88,-79.95 ; 179.88,-79.95 179.88,-79.95 ; 179.88,-79.95 179.88,-79.95 ; 179.88,-79.95 179.88,-79.95 ; 179.88,-79.95 179.88,-79.95 ; 179.88,-79.95 179.88,-79.95 ; 179.88,-79.95 179.88,-79.95 ; 179.88,-79.95 179.88,-79.95 ; 179.88,-79.95 179.88,-79.95 ; 179.88,-79.95 179.88,-79.95 ; 179.88,-79.95 179.88,-79.95 ; 179.88,-79.95 179.88,-79.95 ; 179.88,-79.95 179.88,-79.95 ; 179.88,-79.95 179.88,-79.95 ; 179.88,-79.95 179.88,-79.95 ; 179.88,-79.95 179.88,-79.95 ; 179.88,-79.95 179.88,-79.95 ; 179.88,-79.95 179.88,-79.95 ; 179.88,-79.95 179.88,-79.95 ; 179.88,-79.95 179.88,-79.95 ; 179.88,-79.95 179.88,-79.95 ; 179.88,-79.95 179.88,-79.95 ; 179.88,-79.95 179.88,-79.95 ; 179.88,-79.95 179.88,-79.95 ; 179.88,-79.95 179.88,-79.95 ; 179.88,-79.95 179.88,-79.95 ; 179.88,-79.95 179.88,-79.95 ; 179.88,-79.95 179.88,-79.95 ; 179.88,-79.95 179.88,-79.95 ; 179.88,-79.95 179.88,-79.95 ; 179.88,-79.95 179.88,-79.95 ; 179.88,-79.95 179.88,-79.95 ; 179.88,-79.95 179.88,-79.95 ; 179.88,-79.95 179.88,-79.95 ; 179.88,-79.95 179.88,-79.95 ; 179.88,-79.95 179.88,-79.95 ; 179.88,-79.95 179.88,-79.95 ; 179.88,-79.95 179.96,90 179.88,-79.95 ; 179.88,-79.95 179.88,-79.95 ; 179.88,-79.95 179.88,-79.95 ; 179.88,-79.95 179.88,-79.95 ; 179.88,-79.95 179.88,-79.95 ; 179.88,-79.95 179.88,-79.95 ; 179.88,-79.95 179.88,-79.95 ; 179.88,-79.95 179.88,-79.95 ; 179.88,-79.95 179.88,-79.95 ; 179.88,-79.95 179.88,-79.95 ; 179.88,-79.95 179.88,-79.95 ; 179.88,-79.95 179.88,-79.95 ; 179.88,-79.95 179.88,-79.95 ; 179.88,-79.95 179.88,-79.95 ; 179.88,-79.95 179.88,-79.95 ; 179.88,-79.95 179.88,-79.95 ; 179.88,-79.95 179.88,-79.95 ; 179.88,-79.95 179.88,-79.95 ; 179.88,-79.95 179.88,-79.95 ; 179.88,-79.95 179.88,-79.95 ; 179.88,-79.95 179.88,-79.95 ; 179.88,-79.95 179.88,-79.95 ; 179.88,-79.95 179.88,-79.95 ; 179.88,-79.95 179.88,-79.95 ; 179.88,-79.95 179.88,-79.95 ; 179.88,-79.95 179.88,-79.95 ; 179.88,-79.95 179.88,-79.95 ; 179.88,-79.95 179.88,-79.95 ; 179.88,-79.95 179.88,-79.95 ; 179.88,-79.95 179.88,-79.95 ; 179.88,-79.95 179.88,-79.95 ; 179.88,-79.95 179.88,-79.95 ; 179.88,-79.95 179.88,-79.95 ; 179.88,-79.95 179.88,-79.95 ; 179.88,-79.95 179.88,-79.95 ; 179.88,-79.95 179.88,-79.95 ; 179.88,-79.95 179.88,-79.95 ; 179.88,-79.95 179.88,-79.95 ; 179.88,-79.95 179.88,-79.95 ; 179.88,-79.95 179.88,-79.95 ; 179.88,-79.95 179.88,-79.95 ; 179.88,-79.95 179.88,-79.95 ; 80,-179.86 cw(c0,0) 51.48,-190 cw(c0,0) -118.11,-157.48 ccw(c0,0) 80,-179.86 ; 80,-179.86 80,-179.86 ; 80,-179.86 80,-179.86 ; 80,-179.86 80,-179.86 ; 80,-179.86 80,-179.86 ; 80,-179.86 80,-179.86 ; 80,-179.86 80,-179.86 ; 80,-179.86 80,-179.86 ; 80,-179.86 80,-179.86 ; 80,-179.86 80,-179.86 ; 80,-179.86 80,-179.86 ; 80,-179.86 80,-179.86 ; 80,-179.86 80,-179.86 ; 80,-179.86 80,-179.86 ; 80,-179.86 80,-179.86 ; 80,-179.86 80,-179.86 ; 80,-179.86 80,-179.86 ; 80,-179.86 80,-179.86 ; 80,-179.86 80,-179.86 ; 80,-179.86 80,-179.86 ; 80,-179.86 80,-179.86 ; 80,-179.86 80,-179.86 ; 80,-179.86 80,-179.86 ; 80,-179.86 80,-179.86 ; 80,-179.86 80,-179.86 ; 80,-179.86 80,-179.86 ; 80,-179.86 80,-179.86 ; 80,-179.86 80,-179.86 ; 80,-179.86 80,-179.86 ; 80,-179.86 80,-179.86 ; 80,-179.86 80,-179.86 ; 80,-179.86 80,-179.86 ; 80,-179.86 80,-179.86 ; 80,-179.86 80,-179.86 ; 80,-179.86 80,-179.86 ; 80,-179.86 80,-179.86 ; 80,-179.86 80,-179.86 ; 80,-179.86 80,-179.86 ; 80,-179.86 80,-179.86 ; 80,-179.86 80,-179.86 ; 80,-179.86 80,-179.86 ; 80,-179.86 80,-179.86 ; 80,-179.86 80,-179.86 ; 80,-179.86 80,-179.86 ; 80,-179.86 80,-179.86 ; 80,-179.86 80,-179.86 ; 80,-179.86 80,-179.86 ; 80,-179.86 80,-179.86 ; 80,-179.86 80,-179.86 ; 80,-179.86 80,-179.86 ; 80,-179.86 80,-179.86 ; 80,-179.86 80,-179.86 ; 80,-179.86 80,-179.86 ; 80,-179.86 80,-179.86 ; 80,-179.86 80,-179.86 ; 80,-179.86 80,-179.86 ; 80,-179.86 80,-179.86 ; 80,-179.86 80,-179.86 ; 80,-179.86 80,-179.86 ; 80,-179.86 80,-179.86 ; 80,-179.86 80,-179.86 ; 80,-179.86 80,-179.86 ; 80,-179.86 80,-179.86 ; 80,-179.86 80,-179.86 ; 80,-179.86 80,-179.86 ; 80,-179.86 80,-179.86 ; 80,-179.86 80,-179.86 ; 80,-179.86 80,-179.86 ; 80,-179.86 80,-180 80,-179.86 ; 80,-179.86 80,-179.86 ; 80,-179.86 80,-179.86 ; 80,-179.86 80,-179.86 ; 80,-179.86 80,-179.86 ; 80,-179.86 80,-179.86 ; 80,-179.86 80,-179.86 ; 80,-179.86 80,-179.86 ; 80,-179.86 80,-179.86 ; 80,-179.86 80,-179.86 ; 80,-179.86 80,-179.86 ; 80,-179.86 80,-179.86 ; 80,-179.86 80,-179.86 ; 80,-179.86 80,-179.86 ; 80,-179.86 80,-179.86 ; 80,-179.86 80,-179.86 ; 80,-179.86 80,-179.86 ; 80,-179.86 80,-179.86 ; 80,-179.86 80,-179.86 ; 80,-179.86 80,-179.86 ; 80,-179.86 80,130 80,-179.86 ; 80,-179.86 80,-179.86 ; 80,-179.86 80,-179.86
PCB-KEY#4 [mil]
  round 40 smd: 1(-169.96,-72) 2(179.96,90)
  Top Layer lines w20: -20,-190 -20,150 ; -120,-157.48 -120,90 ; 30,-150 30,138.7 30,190 ; -70,-130 -70,170 ; 130,-90 130,148.76 ; -169.96,-72 -169.96,-71.92 -169.88,97.95 ; 179.96,90 179.96,89.2 ; -169.67,99.81 cw(c0,0) -50.14,190.36 cw(c0,0) -49.47,190.53 cw(c0,0) -26.37,195.08 cw(c0,0) 128.92,148.76 ; 80,-179.86 cw(c0,0) -118.11,-157.48 ccw(c0,0) 51.48,-190 ccw(c0,0) 80,-179.86 ; 80,-179.86 ccw(c0,0) 179.88,-79.95 ; 80,-179.86 ccw(c0,0) 179.88,-79.95 ; 80,-179.86 80,130 80,-179.86 ; 80,-179.86 80,-179.86 ; 80,-179.86 80,-179.86 ; 80,-179.86 80,-179.86 ; 80,-179.86 80,-179.86 ; 80,-179.86 80,-179.86 ; 80,-179.86 80,-179.86 ; 80,-179.86 80,-179.86 ; 80,-179.86 80,-179.86 ; 80,-179.86 80,-179.86 ; 80,-179.86 80,-179.86 ; 80,-179.86 80,-179.86 ; 80,-179.86 80,-179.86 ; 80,-179.86 80,-179.86 ; 80,-179.86 80,-179.86 ; 80,-179.86 80,-179.86 ; 80,-179.86 80,-179.86 ; 80,-179.86 80,-179.86 ; 80,-179.86 80,-179.86 ; 80,-179.86 80,-179.86 ; 80,-179.86 80,-179.86 ; 80,-179.86 80,-179.86 ; 80,-179.86 80,-179.86 ; 80,-179.86 80,-179.86 ; 80,-179.86 80,-179.86 ; 80,-179.86 80,-179.86 ; 80,-179.86 80,-179.86 ; 80,-179.86 80,-179.86 ; 80,-179.86 80,-179.86 ; 80,-179.86 80,-179.86 ; 80,-179.86 80,-179.86 ; 80,-179.86 80,-179.86 ; 80,-179.86 80,-179.86 ; 80,-179.86 80,-179.86 ; 80,-179.86 80,-179.86 ; 80,-179.86 80,-179.86 ; 80,-179.86 80,-179.86 ; 80,-179.86 80,-179.86 ; 80,-179.86 80,-179.86 ; 80,-179.86 80,-179.86 ; 80,-179.86 80,-179.86 ; 80,-179.86 80,-179.86 ; 80,-179.86 80,-179.86 ; 80,-179.86 80,-179.86 ; 80,-179.86 80,-179.86 ; 80,-179.86 80,-179.86 ; 80,-179.86 80,-179.86 ; 80,-179.86 80,-179.86 ; 80,-179.86 80,-179.86 ; 80,-179.86 80,-179.86 ; 80,-179.86 80,-179.86 ; 80,-179.86 80,-179.86 ; 80,-179.86 80,-179.86 ; 80,-179.86 80,-179.86 ; 80,-179.86 80,-179.86 ; 80,-179.86 80,-179.86 ; 80,-179.86 80,-179.86 ; 80,-179.86 80,-179.86 ; 80,-179.86 80,-179.86 ; 80,-179.86 80,-179.86 ; 80,-179.86 80,-179.86 ; 80,-179.86 80,-179.86 ; 80,-179.86 80,-179.86 ; 80,-179.86 80,-179.86 ; 80,-179.86 80,-179.86 ; 80,-179.86 80,-179.86 ; 80,-179.86 80,-179.86 ; 80,-179.86 80,-179.86 ; 80,-179.86 80,-179.86 ; 80,-179.86 80,-179.86 ; 80,-179.86 80,-179.86 ; 80,-179.86 80,-179.86 ; 80,-179.86 80,-179.86 ; 80,-179.86 80,-179.86 ; 80,-179.86 80,-179.86 ; 80,-179.86 80,-179.86 ; 80,-179.86 80,-179.86 ; 80,-179.86 80,-179.86 ; 80,-179.86 80,-179.86 ; 80,-179.86 80,-179.86 ; 80,-179.86 80,-179.86 ; 80,-179.86 80,-179.86 ; 80,-179.86 80,-179.86 ; 80,-179.86 80,-179.86 ; 80,-179.86 80,-179.86 ; 80,-179.86 80,-179.86 ; 80,-179.86 80,-179.86 ; 80,-179.86 80,-179.86 ; 80,-179.86 80,-180 80,-179.86 ; 80,-179.86 80,-179.86 ; 80,-179.86 80,-179.86 ; 80,-179.86 80,-179.86 ; 80,-179.86 80,-179.86 ; 80,-179.86 80,-179.86 ; 80,-179.86 80,-179.86 ; 80,-179.86 80,-179.86 ; 80,-179.86 80,-179.86 ; 80,-179.86 80,-179.86 ; 80,-179.86 80,-179.86 ; 80,-179.86 80,-179.86 ; 80,-179.86 80,-179.86 ; 80,-179.86 80,-179.86 ; 80,-179.86 80,-179.86 ; 80,-179.86 80,-179.86 ; 179.88,-79.95 179.88,-79.95 ; 179.88,-79.95 179.88,-79.95 ; 179.88,-79.95 179.88,-79.95 ; 179.88,-79.95 179.88,-79.95 ; 179.88,-79.95 179.88,-79.95 ; 179.88,-79.95 179.88,-79.95 ; 179.88,-79.95 179.88,-79.95 ; 179.88,-79.95 179.88,-79.95 ; 179.88,-79.95 179.88,-79.95 ; 179.88,-79.95 179.88,-79.95 ; 179.88,-79.95 179.88,-79.95 ; 179.88,-79.95 179.88,-79.95 ; 179.88,-79.95 179.88,-79.95 ; 179.88,-79.95 179.88,-79.95 ; 179.88,-79.95 179.88,-79.95 ; 179.88,-79.95 179.88,-79.95 ; 179.88,-79.95 179.88,-79.95 ; 179.88,-79.95 179.88,-79.95 ; 179.88,-79.95 179.88,-79.95 ; 179.88,-79.95 179.88,-79.95 ; 179.88,-79.95 179.88,-79.95 ; 179.88,-79.95 179.88,-79.95 ; 179.88,-79.95 179.88,-79.95 ; 179.88,-79.95 179.88,-79.95 ; 179.88,-79.95 179.88,-79.95 ; 179.88,-79.95 179.88,-79.95 ; 179.88,-79.95 179.88,-79.95 ; 179.88,-79.95 179.88,-79.95 ; 179.88,-79.95 179.88,-79.95 ; 179.88,-79.95 179.88,-79.95 ; 179.88,-79.95 179.88,-79.95 ; 179.88,-79.95 179.88,-79.95 ; 179.88,-79.95 179.88,-79.95 ; 179.88,-79.95 179.88,-79.95 ; 179.88,-79.95 179.88,-79.95 ; 179.88,-79.95 179.88,-79.95 ; 179.88,-79.95 179.88,-79.95 ; 179.88,-79.95 179.88,-79.95 ; 179.88,-79.95 179.88,-79.95 ; 179.88,-79.95 179.88,-79.95 ; 179.88,-79.95 179.88,-79.95 ; 179.88,-79.95 179.88,-79.95 ; 179.88,-79.95 179.88,-79.95 ; 179.88,-79.95 179.88,-79.95 ; 179.88,-79.95 179.88,-79.95 ; 179.88,-79.95 179.88,-79.95 ; 179.88,-79.95 179.88,-79.95 ; 179.88,-79.95 179.88,-79.95 ; 179.88,-79.95 179.88,-79.95 ; 179.88,-79.95 179.88,-79.95 ; 179.88,-79.95 179.88,-79.95 ; 179.88,-79.95 179.88,-79.95 ; 179.88,-79.95 179.88,-79.95 ; 179.88,-79.95 179.88,-79.95 ; 179.88,-79.95 179.88,-79.95 ; 179.88,-79.95 179.88,-79.95 ; 179.88,-79.95 179.88,-79.95 ; 179.88,-79.95 179.88,-79.95 ; 179.88,-79.95 179.88,-79.95 ; 179.88,-79.95 179.88,-79.95 ; 179.88,-79.95 179.88,-79.95 ; 179.88,-79.95 179.88,-79.95 ; 179.88,-79.95 179.88,-79.95 ; 179.88,-79.95 179.88,-79.95 ; 179.88,-79.95 179.88,-79.95 ; 179.88,-79.95 179.88,-79.95 ; 179.88,-79.95 179.96,89.2 ; 179.88,-79.95 179.88,-79.95 ; 179.88,-79.95 179.96,89.2 ; 179.88,-79.95 179.88,-79.95 ; 179.88,-79.95 179.88,-79.95 ; 179.88,-79.95 179.88,-79.95 ; 179.88,-79.95 179.88,-79.95 ; 179.88,-79.95 179.88,-79.95 ; 179.88,-79.95 179.88,-79.95 ; 179.88,-79.95 179.88,-79.95 ; 179.88,-79.95 179.88,-79.95 ; 179.88,-79.95 179.88,-79.95 ; 179.88,-79.95 179.88,-79.95 ; 179.88,-79.95 179.88,-79.95 ; 179.88,-79.95 179.88,-79.95 ; 179.88,-79.95 179.88,-79.95 ; 179.88,-79.95 179.88,-79.95 ; 179.88,-79.95 179.88,-79.95 ; 179.88,-79.95 179.88,-79.95 ; 179.88,-79.95 179.88,-79.95 ; 179.88,-79.95 179.88,-79.95 ; 179.88,-79.95 179.88,-79.95 ; 179.88,-79.95 179.88,-79.95 ; 179.88,-79.95 179.88,-79.95 ; 179.88,-79.95 179.88,-79.95 ; 179.88,-79.95 179.88,-79.95 ; 179.88,-79.95 179.88,-79.95 ; 179.88,-79.95 179.88,-79.95 ; 179.88,-79.95 179.88,-79.95 ; 179.88,-79.95 179.88,-79.95 ; 179.88,-79.95 179.88,-79.95 ; 179.88,-79.95 179.88,-79.95 ; 179.88,-79.95 179.88,-79.95 ; 179.88,-79.95 179.88,-79.95 ; 179.88,-79.95 179.88,-79.95 ; 179.88,-79.95 179.88,-79.95 ; 179.88,-79.95 179.88,-79.95 ; 179.88,-79.95 179.88,-79.95
PCB-KEY#5 [mil]
  round 40 smd: 1(-169.96,-72) 2(179.96,90)
  Top Layer lines w20: -20,-190 -20,150 ; -120,-157.48 -120,90 ; 30,-150 30,136.9 30,182.8 30,190 ; -70,-130 -70,136.69 -70,170 ; 130,-90 130,148.76 ; -169.96,-72 -169.88,97.95 ; -169.67,99.81 cw(c0,0) 73.05,182.8 cw(c0,0) 128.92,148.76 ; 80,-179.86 ccw(c0,0) 179.88,-79.95 ; 80,-179.86 ccw(c0,0) 179.88,-79.95 ; 80,-179.86 cw(c0,0) -118.11,-157.48 ccw(c0,0) 51.48,-190 ccw(c0,0) 80,-179.86 ; 80,-179.86 80,130 80,-179.86 ; 80,-179.86 80,-179.86 ; 80,-179.86 80,-179.86 ; 80,-179.86 80,-179.86 ; 80,-179.86 80,-179.86 ; 80,-179.86 80,-179.86 ; 80,-179.86 80,-179.86 ; 80,-179.86 80,-179.86 ; 80,-179.86 80,-179.86 ; 80,-179.86 80,-179.86 ; 80,-179.86 80,-179.86 ; 80,-179.86 80,-179.86 ; 80,-179.86 80,-179.86 ; 80,-179.86 80,-179.86 ; 80,-179.86 80,-179.86 ; 80,-179.86 80,-179.86 ; 80,-179.86 80,-179.86 ; 80,-179.86 80,-179.86 ; 80,-179.86 80,-179.86 ; 80,-179.86 80,-179.86 ; 80,-179.86 80,-179.86 ; 80,-179.86 80,-179.86 ; 80,-179.86 80,-179.86 ; 80,-179.86 80,-179.86 ; 80,-179.86 80,-179.86 ; 80,-179.86 80,-179.86 ; 80,-179.86 80,-179.86 ; 80,-179.86 80,-179.86 ; 80,-179.86 80,-179.86 ; 80,-179.86 80,-179.86 ; 80,-179.86 80,-179.86 ; 80,-179.86 80,-179.86 ; 80,-179.86 80,-179.86 ; 80,-179.86 80,-179.86 ; 80,-179.86 80,-179.86 ; 80,-179.86 80,-179.86 ; 80,-179.86 80,-179.86 ; 80,-179.86 80,-179.86 ; 80,-179.86 80,-179.86 ; 80,-179.86 80,-179.86 ; 80,-179.86 80,-179.86 ; 80,-179.86 80,-179.86 ; 80,-179.86 80,-179.86 ; 80,-179.86 80,-179.86 ; 80,-179.86 80,-179.86 ; 80,-179.86 80,-179.86 ; 80,-179.86 80,-179.86 ; 80,-179.86 80,-179.86 ; 80,-179.86 80,-180 80,-179.86 ; 80,-179.86 80,-179.86 ; 80,-179.86 80,-179.86 ; 80,-179.86 80,-179.86 ; 80,-179.86 80,-179.86 ; 80,-179.86 80,-179.86 ; 80,-179.86 80,-179.86 ; 80,-179.86 80,-179.86 ; 80,-179.86 80,-179.86 ; 80,-179.86 80,-179.86 ; 80,-179.86 80,-179.86 ; 80,-179.86 80,-179.86 ; 80,-179.86 80,-179.86 ; 80,-179.86 80,-179.86 ; 80,-179.86 80,-179.86 ; 80,-179.86 80,-179.86 ; 80,-179.86 80,-179.86 ; 80,-179.86 80,-179.86 ; 80,-179.86 80,-179.86 ; 80,-179.86 80,-179.86 ; 80,-179.86 80,-179.86 ; 80,-179.86 80,-179.86 ; 80,-179.86 80,-179.86 ; 80,-179.86 80,-179.86 ; 80,-179.86 80,-179.86 ; 80,-179.86 80,-179.86 ; 80,-179.86 80,-179.86 ; 80,-179.86 80,-179.86 ; 80,-179.86 80,-179.86 ; 80,-179.86 80,-179.86 ; 80,-179.86 80,-179.86 ; 80,-179.86 80,-179.86 ; 80,-179.86 80,-179.86 ; 80,-179.86 80,-179.86 ; 80,-179.86 80,-179.86 ; 80,-179.86 80,-179.86 ; 80,-179.86 80,-179.86 ; 80,-179.86 80,-179.86 ; 80,-179.86 80,-179.86 ; 80,-179.86 80,-179.86 ; 80,-179.86 80,-179.86 ; 80,-179.86 80,-179.86 ; 80,-179.86 80,-179.86 ; 80,-179.86 80,-179.86 ; 179.88,-79.95 179.96,90 179.88,-79.95 ; 179.88,-79.95 179.88,-79.95 ; 179.88,-79.95 179.88,-79.95
PCB-KEY#6 [mil]
  round 40 smd: 1(-169.96,-72) 2(179.96,90)
  Top Layer lines w20: -20,-190 -20,150 ; -120,-157.48 -120,56.99 -120,90 ; 30,-150 30,129.09 30,190 ; -70,-130 -70,136.89 -70,170 ; 130,-90 130,148.76 ; -169.96,-72 -169.96,-71.92 -169.96,-71.01 ; -169.88,97.95 -169.96,-71.01 ; -169.67,99.81 cw(c0,0) -49.47,190.53 cw(c0,0) 24.71,195.29 cw(c0,0) 128.92,148.76 ; 80,-179.86 cw(c0,0) -118.11,-157.48 ccw(c0,0) 51.48,-190 ccw(c0,0) 80,-179.86 ; 80,-179.86 ccw(c0,0) 139.38,-139.01 ccw(c0,0) 179.88,-79.95 ; 80,-179.86 ccw(c0,0) 179.88,-79.95 ; 80,-179.86 80,-102.91 ; 80,-179.86 80,-102.91 ; 80,-179.86 80,-179.86 ; 80,-179.86 80,-179.86 ; 80,-179.86 80,-179.86 ; 80,-179.86 80,-179.86 ; 80,-179.86 80,-179.86 ; 80,-179.86 80,-179.86 ; 80,-179.86 80,-179.86 ; 80,-179.86 80,-179.86 ; 80,-179.86 80,-179.86 ; 80,-179.86 80,-179.86 ; 80,-179.86 80,-179.86 ; 80,-179.86 80,-179.86 ; 80,-179.86 80,-179.86 ; 80,-179.86 80,-179.86 ; 80,-179.86 80,-179.86 ; 80,-179.86 80,-179.86 ; 80,-179.86 80,-179.86 ; 80,-179.86 80,-179.86 ; 80,-179.86 80,-179.86 ; 80,-179.86 80,-179.86 ; 80,-179.86 80,-179.86 ; 80,-179.86 80,-179.86 ; 80,-179.86 80,-179.86 ; 80,-179.86 80,-179.86 ; 80,-179.86 80,-179.86 ; 80,-179.86 80,-179.86 ; 80,-179.86 80,-179.86 ; 80,-179.86 80,-179.86 ; 80,-179.86 80,-179.86 ; 80,-179.86 80,-179.86 ; 80,-179.86 80,-179.86 ; 80,-179.86 80,-179.86 ; 80,-179.86 80,-179.86 ; 80,-179.86 80,-179.86 ; 80,-179.86 80,-179.86 ; 80,-179.86 80,-179.86 ; 80,-179.86 80,-179.86 ; 80,-179.86 80,-179.86 ; 80,-179.86 80,-179.86 ; 80,-179.86 80,-179.86 ; 80,-179.86 80,-179.86 ; 80,-179.86 80,-179.86 ; 80,-179.86 80,-179.86 ; 80,-179.86 80,-179.86 ; 80,-179.86 80,-179.86 ; 80,-179.86 80,-179.86 ; 80,-179.86 80,-179.86 ; 80,-179.86 80,-179.86 ; 80,-179.86 80,-179.86 ; 80,-179.86 80,-179.86 ; 80,-179.86 80,-179.86 ; 80,-179.86 80,-179.86 ; 80,-179.86 80,-179.86 ; 80,-179.86 80,-179.86 ; 80,-179.86 80,-179.86 ; 80,-179.86 80,-179.86 ; 80,-179.86 80,-179.86 ; 80,-179.86 80,-179.86 ; 80,-179.86 80,-179.86 ; 80,-179.86 80,-179.86 ; 80,-179.86 80,-179.86 ; 80,-179.86 80,-179.86 ; 80,-179.86 80,-179.86 ; 80,-179.86 80,-179.86 ; 80,-179.86 80,-179.86 ; 80,-179.86 80,-179.86 ; 80,-179.86 80,-179.86 ; 80,-179.86 80,-179.86 ; 80,-179.86 80,-179.86 ; 80,-179.86 80,-179.86 ; 80,-179.86 80,-179.86 ; 80,-179.86 80,-179.86 ; 80,-179.86 80,-179.86 ; 80,-179.86 80,-179.86 ; 80,-179.86 80,-179.86 ; 80,-179.86 80,-180 80,-179.86 ; 80,-179.86 80,-179.86 ; 80,-179.86 80,-179.86 ; 80,-179.86 80,-179.86 ; 80,-179.86 80,-179.86 ; 80,-179.86 80,-179.86 ; 80,-179.86 80,-179.86 ; 80,-179.86 80,-179.86 ; 80,-179.86 80,-179.86 ; 80,-179.86 80,-179.86 ; 80,-179.86 80,-179.86 ; 80,-179.86 80,-179.86 ; 80,-179.86 80,-179.86 ; 80,-179.86 80,-179.86 ; 80,-102.91 80,130 80,-102.91 ; 179.88,-79.95 179.88,-79.95 ; 179.88,-79.95 179.88,-79.95 ; 179.88,-79.95 179.88,-79.95 ; 179.88,-79.95 179.88,-79.95 ; 179.88,-79.95 179.88,-79.95 ; 179.88,-79.95 179.88,-79.95 ; 179.88,-79.95 179.88,-79.95 ; 179.88,-79.95 179.88,-79.95 ; 179.88,-79.95 179.88,-79.95 ; 179.88,-79.95 179.88,-79.95 ; 179.88,-79.95 179.88,-79.95 ; 179.88,-79.95 179.88,-79.95 ; 179.88,-79.95 179.88,-79.95 ; 179.88,-79.95 179.88,-79.95 ; 179.88,-79.95 179.88,-79.95 ; 179.88,-79.95 179.88,-79.95 ; 179.88,-79.95 179.88,-79.95 ; 179.88,-79.95 179.88,-79.95 ; 179.88,-79.95 179.88,-79.95 ; 179.88,-79.95 179.88,-79.95 ; 179.88,-79.95 179.88,-79.95 ; 179.88,-79.95 179.88,-79.95 ; 179.88,-79.95 179.88,-79.95 ; 179.88,-79.95 179.88,-79.95 ; 179.88,-79.95 179.88,-79.95 ; 179.88,-79.95 179.88,-79.95 ; 179.88,-79.95 179.88,-79.95 ; 179.88,-79.95 179.88,-79.95 ; 179.88,-79.95 179.88,-79.95 ; 179.88,-79.95 179.88,-79.95 ; 179.88,-79.95 179.88,-79.95 ; 179.88,-79.95 179.88,-79.95 ; 179.88,-79.95 179.88,-79.95 ; 179.88,-79.95 179.88,-79.95 ; 179.88,-79.95 179.88,-79.95 ; 179.88,-79.95 179.88,-79.95 ; 179.88,-79.95 179.88,-79.95 ; 179.88,-79.95 179.88,-79.95 ; 179.88,-79.95 179.88,-79.95 ; 179.88,-79.95 179.88,-79.95 ; 179.88,-79.95 179.88,-79.95 ; 179.88,-79.95 179.88,-79.95 ; 179.88,-79.95 179.88,-79.95 ; 179.88,-79.95 179.88,-79.95 ; 179.88,-79.95 179.88,-79.95 ; 179.88,-79.95 179.88,-79.95 ; 179.88,-79.95 179.88,-79.95 ; 179.88,-79.95 179.88,-79.95 ; 179.88,-79.95 179.88,-79.95 ; 179.88,-79.95 179.88,-79.95 ; 179.88,-79.95 179.88,-79.95 ; 179.88,-79.95 179.88,-79.95 ; 179.88,-79.95 179.88,-79.95 ; 179.88,-79.95 179.88,-79.95 ; 179.88,-79.95 179.96,90 179.88,-79.95 ; 179.88,-79.95 179.88,-79.95 ; 179.88,-79.95 179.88,-79.95 ; 179.88,-79.95 179.88,-79.95 ; 179.88,-79.95 179.88,-79.95 ; 179.88,-79.95 179.88,-79.95 ; 179.88,-79.95 179.88,-79.95 ; 179.88,-79.95 179.88,-79.95 ; 179.88,-79.95 179.88,-79.95 ; 179.88,-79.95 179.88,-79.95 ; 179.88,-79.95 179.88,-79.95 ; 179.88,-79.95 179.88,-79.95 ; 179.88,-79.95 179.88,-79.95 ; 179.88,-79.95 179.88,-79.95 ; 179.88,-79.95 179.88,-79.95 ; 179.88,-79.95 179.88,-79.95 ; 179.88,-79.95 179.88,-79.95 ; 179.88,-79.95 179.88,-79.95 ; 179.88,-79.95 179.88,-79.95 ; 179.88,-79.95 179.88,-79.95 ; 179.88,-79.95 179.88,-79.95 ; 179.88,-79.95 179.88,-79.95 ; 179.88,-79.95 179.88,-79.95 ; 179.88,-79.95 179.88,-79.95 ; 179.88,-79.95 179.88,-79.95 ; 179.88,-79.95 179.88,-79.95 ; 179.88,-79.95 179.88,-79.95 ; 179.88,-79.95 179.88,-79.95 ; 179.88,-79.95 179.88,-79.95 ; 179.88,-79.95 179.88,-79.95 ; 179.88,-79.95 179.88,-79.95 ; 179.88,-79.95 179.88,-79.95 ; 179.88,-79.95 179.88,-79.95 ; 179.88,-79.95 179.88,-79.95 ; 179.88,-79.95 179.88,-79.95 ; 179.88,-79.95 179.88,-79.95 ; 179.88,-79.95 179.88,-79.95 ; -169.96,-71.01 -169.96,-71.01
PCB-KEY#7 [mil]
  round 40 smd: 1(-169.96,-72) 2(179.96,90)
  Top Layer lines w20: 30,190 30,-150 ; -70,170 -70,-93.6 -70,-112.56 -70,-130 ; -20,150 -20,-190 ; 128.92,148.76 ccw(c0,0) -169.67,99.81 ; 130,148.76 130,-90 ; -169.88,97.95 -169.96,-72 ; -120,90 -120,-157.48 ; 179.88,-79.95 cw(c0,0) 80,-179.86 ; 179.88,-79.95 cw(c0,0) 80,-179.86 ; 179.88,-79.95 179.88,-79.95 ; 179.88,-79.95 179.88,-79.95 ; 179.88,-79.95 179.88,-79.95 ; 179.88,-79.95 179.88,-79.95 ; 179.88,-79.95 179.88,-79.95 ; 179.88,-79.95 179.88,-79.95 ; 179.88,-79.95 179.88,-79.95 ; 179.88,-79.95 179.88,-79.95 ; 179.88,-79.95 179.88,-79.95 ; 179.88,-79.95 179.88,-79.95 ; 179.88,-79.95 179.88,-79.95 ; 179.88,-79.95 179.88,-79.95 ; 179.88,-79.95 179.88,-79.95 ; 179.88,-79.95 179.88,-79.95 ; 179.88,-79.95 179.88,-79.95 ; 179.88,-79.95 179.88,-79.95 ; 179.88,-79.95 179.88,-79.95 ; 179.88,-79.95 179.88,-79.95 ; 179.88,-79.95 179.88,-79.95 ; 179.88,-79.95 179.88,-79.95 ; 179.88,-79.95 179.88,-79.95 ; 179.88,-79.95 179.88,-79.95 ; 179.88,-79.95 179.88,-79.95 ; 179.88,-79.95 179.88,-79.95 ; 179.88,-79.95 179.88,-79.95 ; 179.88,-79.95 179.88,-79.95 ; 179.88,-79.95 179.88,-79.95 ; 179.88,-79.95 179.88,-79.95 ; 179.88,-79.95 179.88,-79.95 ; 179.88,-79.95 179.88,-79.95 ; 179.88,-79.95 179.88,-79.95 ; 179.88,-79.95 179.88,-79.95 ; 179.88,-79.95 179.88,-79.95 ; 179.88,-79.95 179.88,-79.95 ; 179.88,-79.95 179.88,-79.95 ; 179.88,-79.95 179.88,-79.95 ; 179.88,-79.95 179.88,-79.95 ; 179.88,-79.95 179.88,-79.95 ; 179.88,-79.95 179.88,-79.95 ; 179.88,-79.95 179.88,-79.95 ; 179.88,-79.95 179.88,-79.95 ; 179.88,-79.95 179.88,-79.95 ; 179.88,-79.95 179.88,-79.95 ; 179.88,-79.95 179.88,-79.95 ; 179.88,-79.95 179.88,-79.95 ; 179.88,-79.95 179.88,-79.95 ; 179.88,-79.95 179.88,-79.95 ; 179.88,-79.95 179.88,-79.95 ; 179.88,-79.95 179.88,-79.95 ; 179.88,-79.95 179.88,-79.95 ; 179.88,-79.95 179.88,-79.95 ; 179.88,-79.95 179.88,-79.95 ; 179.88,-79.95 179.88,-79.95 ; 179.88,-79.95 179.88,-79.95 ; 179.88,-79.95 179.88,-79.95 ; 179.88,-79.95 179.88,-79.95 ; 179.88,-79.95 179.88,-79.95 ; 179.88,-79.95 179.88,-79.95 ; 179.88,-79.95 179.88,-79.95 ; 179.88,-79.95 179.88,-79.95 ; 179.88,-79.95 179.88,-79.95 ; 179.88,-79.95 179.88,-79.95 ; 179.88,-79.95 179.96,90 179.88,-79.95 ; 179.88,-79.95 179.88,-79.95 ; 179.88,-79.95 179.88,-79.95 ; 179.88,-79.95 179.88,-79.95 ; 179.88,-79.95 179.88,-79.95 ; 179.88,-79.95 179.88,-79.95 ; 179.88,-79.95 179.88,-79.95 ; 179.88,-79.95 179.88,-79.95 ; 179.88,-79.95 179.88,-79.95 ; 179.88,-79.95 179.88,-79.95 ; 179.88,-79.95 179.88,-79.95 ; 179.88,-79.95 179.88,-79.95 ; 179.88,-79.95 179.88,-79.95 ; 179.88,-79.95 179.88,-79.95 ; 179.88,-79.95 179.88,-79.95 ; 179.88,-79.95 179.88,-79.95 ; 179.88,-79.95 179.88,-79.95 ; 179.88,-79.95 179.88,-79.95 ; 179.88,-79.95 179.88,-79.95 ; 179.88,-79.95 179.88,-79.95 ; 179.88,-79.95 179.88,-79.95 ; 179.88,-79.95 179.88,-79.95 ; 179.88,-79.95 179.88,-79.95 ; 179.88,-79.95 179.88,-79.95 ; 179.88,-79.95 179.88,-79.95 ; 179.88,-79.95 179.88,-79.95 ; 179.88,-79.95 179.88,-79.95 ; 179.88,-79.95 179.88,-79.95 ; 179.88,-79.95 179.88,-79.95 ; 179.88,-79.95 179.88,-79.95 ; 179.88,-79.95 179.88,-79.95 ; 179.88,-79.95 179.88,-79.95 ; 179.88,-79.95 179.88,-79.95 ; 179.88,-79.95 179.88,-79.95 ; 179.88,-79.95 179.88,-79.95 ; 179.88,-79.95 179.88,-79.95 ; 179.88,-79.95 179.88,-79.95 ; 179.88,-79.95 179.88,-79.95 ; 179.88,-79.95 179.88,-79.95 ; 179.88,-79.95 179.88,-79.95 ; 179.88,-79.95 179.88,-79.95 ; 179.88,-79.95 179.88,-79.95 ; 179.88,-79.95 179.88,-79.95 ; 80,-179.86 cw(c0,0) 51.48,-190 cw(c0,0) -118.11,-157.48 ccw(c0,0) 80,-179.86 ; 80,-179.86 80,-179.86 ; 80,-179.86 80,-179.86 ; 80,-179.86 80,-179.86 ; 80,-179.86 80,-180 80,-179.86 ; 80,-179.86 80,-179.86 ; 80,-179.86 80,-179.86 ; 80,-179.86 80,-179.86 ; 80,-179.86 80,-179.86 ; 80,-179.86 80,-179.86 ; 80,-179.86 80,-179.86 ; 80,-179.86 80,-179.86 ; 80,-179.86 80,-179.86 ; 80,-179.86 80,-179.86 ; 80,-179.86 80,-179.86 ; 80,-179.86 80,-179.86 ; 80,-179.86 80,-179.86 ; 80,-179.86 80,-179.86 ; 80,-179.86 80,-179.86 ; 80,-179.86 80,-179.86 ; 80,-179.86 80,-179.86 ; 80,-179.86 80,-179.86 ; 80,-179.86 80,-179.86 ; 80,-179.86 80,-179.86 ; 80,-179.86 80,-179.86 ; 80,-179.86 80,-179.86 ; 80,-179.86 80,-179.86 ; 80,-179.86 80,-179.86 ; 80,-179.86 80,-179.86 ; 80,-179.86 80,-179.86 ; 80,-179.86 80,-179.86 ; 80,-179.86 80,-179.86 ; 80,-179.86 80,-179.86 ; 80,-179.86 80,-179.86 ; 80,-179.86 80,-179.86 ; 80,-179.86 80,-179.86 ; 80,-179.86 80,-179.86 ; 80,-179.86 80,-179.86 ; 80,-179.86 80,-179.86 ; 80,-179.86 80,-179.86 ; 80,-179.86 80,-179.86 ; 80,-179.86 80,-179.86 ; 80,-179.86 80,-179.86 ; 80,-179.86 80,-179.86 ; 80,-179.86 80,-179.86 ; 80,-179.86 80,-179.86 ; 80,-179.86 80,-179.86 ; 80,-179.86 80,-179.86 ; 80,-179.86 80,-179.86 ; 80,-179.86 80,-179.86 ; 80,-179.86 80,-179.86 ; 80,-179.86 80,-179.86 ; 80,-179.86 80,-179.86 ; 80,-179.86 80,-179.86 ; 80,-179.86 80,-179.86 ; 80,-179.86 80,-179.86 ; 80,-179.86 80,-179.86 ; 80,-179.86 80,-179.86 ; 80,-179.86 80,-179.86 ; 80,-179.86 80,-179.86 ; 80,-179.86 80,-179.86 ; 80,-179.86 80,-179.86 ; 80,-179.86 80,-179.86 ; 80,-179.86 80,-179.86 ; 80,-179.86 80,-179.86 ; 80,-179.86 80,-179.86 ; 80,-179.86 80,-179.86 ; 80,-179.86 80,-179.86 ; 80,-179.86 80,-179.86 ; 80,-179.86 80,-179.86 ; 80,-179.86 80,-179.86 ; 80,-179.86 80,-179.86 ; 80,-179.86 80,-179.86 ; 80,-179.86 80,-179.86 ; 80,-179.86 80,-179.86 ; 80,-179.86 80,-179.86 ; 80,-179.86 80,-179.86 ; 80,-179.86 80,-179.86 ; 80,-179.86 80,-179.86 ; 80,-179.86 80,-179.86 ; 80,-179.86 80,-179.86 ; 80,-179.86 80,-179.86 ; 80,-179.86 80,-179.86 ; 80,-179.86 80,-179.86 ; 80,-179.86 80,-179.86 ; 80,-179.86 80,-179.86 ; 80,-179.86 80,-179.86 ; 80,-179.86 80,-179.86 ; 80,-179.86 80,-179.86 ; 80,-179.86 80,-179.86 ; 80,-179.86 80,-179.86 ; 80,-179.86 80,-179.86 ; 80,-179.86 80,-179.86 ; 80,-179.86 80,-179.86 ; 80,-179.86 80,-179.86 ; 80,-179.86 80,-179.86 ; 80,-179.86 80,-179.86 ; 80,-179.86 80,-179.86 ; 80,-179.86 80,-179.86 ; 80,-179.86 80,-179.86 ; 80,-179.86 80,-179.86 ; 80,-179.86 80,-179.86 ; 80,-179.86 80,-179.86 ; 80,-179.86 80,-179.86 ; 80,-179.86 80,-179.86 ; 80,-179.86 80,130 80,-179.86 ; 80,-179.86 80,-179.86